# Altium PCB turnsig2.PcbDoc
Units mil, origin at the board's own origin, x right, y up, seen from the top; angles counter-clockwise.
Board outline 990 x 400 mil, 2 copper layers (Top Layer, Bottom Layer); 17 components, 13 nets, 48 pads, 6 vias.
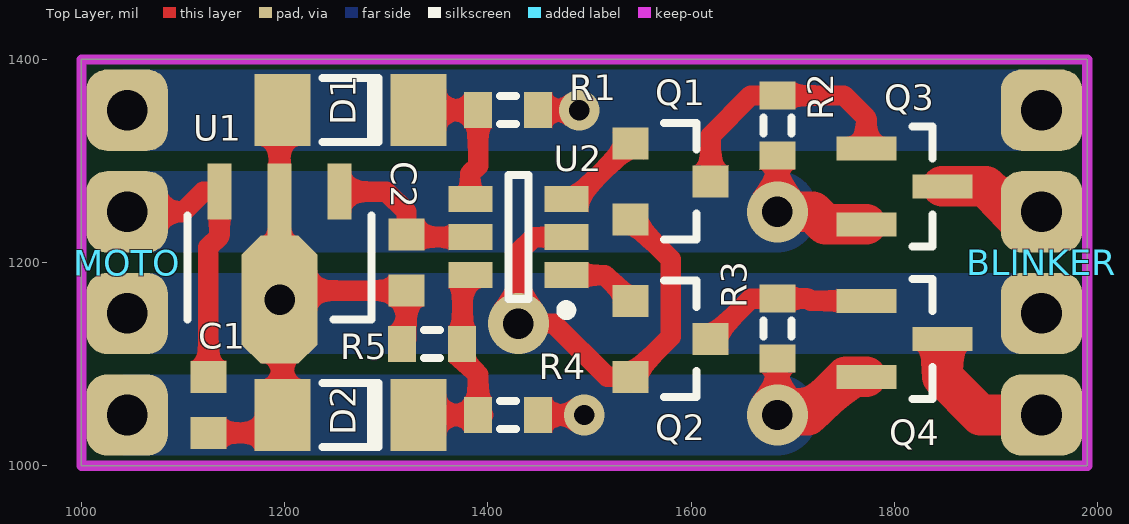
[diagram p0: Top Layer view]
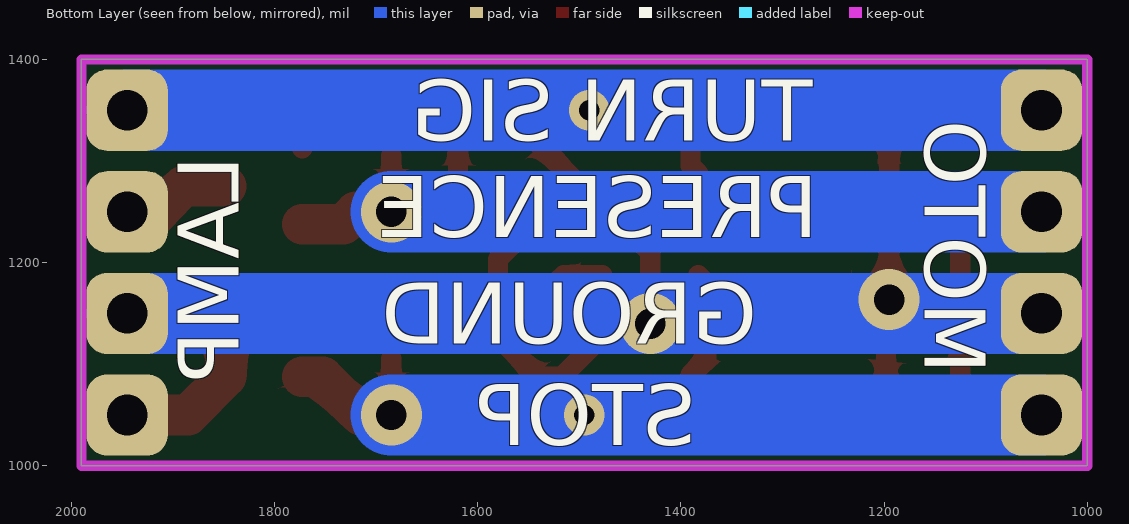
[diagram p1: Bottom Layer view, seen from below]

## Layer stack, top to bottom
Top Solder: solder mask 0.4, Solder Resist, Dk 3.5
Top Layer: signal copper 1.4
Dielectric 1: dielectric 12.6, FR-4, Dk 4.8
Bottom Layer: signal copper 1.4
Bottom Solder: solder mask 0.4, Solder Resist, Dk 3.5

## Board outline
1000,1000 1000,1400 1990,1400 1990,1000

## Design rules (kind name [scope] priority, off if disabled: settings)
Clearance [All] p1: gap=5 ignorepadtopadclearanceinfootprint=TRUE except(0: Arc-Text Track-Text SMDPad-Text THPad-Text Via-Text Fill-Text Poly-Text Region-Text Text-Text Text-Hole)
HoleSize [All] p1: absolutevalues=TRUE maxlimit=250 minlimit=1 maxpercent=80.000 minpercent=20.000
PolygonConnect [All] p1: connectstyle=Relief reliefconductorwidth=10 reliefentries=4 polygonreliefangle="90 Angle" airgapwidth=10
RoomDefinition turnsig2 [InComponentClass('turnsig2')] p1: confinementstyle=ConfineIn formatcopy=TRUE lockcomponents=FALSE outline 860,970 2395,970 2395,1465 860,1465
RoutingVias [All] p1: holewidth=28 width=50 viastyle="Through Hole" minholewidth=28 minwidth=50 maxholewidth=28 maxwidth=50
SilkToSilkClearance [All] p1: silktosilkclearance=0
SilkToSolderMaskClearance [IsPad] p1: minsilkscreentomaskgap=0 clearancetoexposedcopper=TRUE
SolderMaskExpansion [All] p1: expansion=0
Width [All] p1: maxlimit=100 minlimit=10 preferedwidth=20
27 further rules are at their usual default settings.

## Components (designator, comment, footprint, x,y, rotation, side; value= is the part's Value field where it differs from the comment)
BLINKER "Header 4" wireheader 1945,1200 r0 top
C1 "Cap Semi" 1608[0603] 1125,1060 r270 top value=1uF
C2 "Cap Semi" 1608[0603] 1320,1200 r270 top value=1uF
D1 "TZMC4V7-GS08" SOD-80/MLL34 1265,1350 r0 top
D2 "TZMC4V7-GS08" SOD-80/MLL34 1265,1050 r0 top
MOTO "Header 4" wireheader 1045,1200 r0 top
Q1 "2N7002KT1G" ONSC-SOT-23-3-318-08_V 1580,1280 r0 top
Q2 "2N7002KT1G" ONSC-SOT-23-3-318-08_V 1580,1125 r0 top
Q3 "IRLML9303TRPBF" SOT23-3N 1810,1275 r0 top
Q4 "IRLML9303TRPBF" SOT23-3N 1810,1125 r0 top
R1 "Res3" J1-0603 1420,1350 r0 top value=5k1
R2 "Res3" J1-0603 1685,1335 r270 top value=5k1
R3 "Res3" J1-0603 1685,1135 r270 top value=5k1
R4 "Res3" J1-0603 1420,1050 r0 top value=5k1
R5 "Res3" J1-0603 1345,1120 r0 top value=5k1
U1 "L78L05ABUTR" SOT-89_N 1195,1195 r270 top
U2 "ATtiny10-TSHR" 6ST1_N 1430,1225 r180 top

## Footprints (in the part's own frame and the unit in brackets; to place one, negate y for a bottom-side part, rotate by r counter-clockwise, add the part's x,y. Pads: shape width x height; smd on the part's side, far side on the other; paste and mask are expansions set on the pad)
6ST1_N [mm] "SOT23, 6-Leads, Body 2.9x1.6mm, Pitch 0.95mm, Lead Span 2.7mm, IPC Medium Density"
  rect 1.1x0.65 smd: 1(-1.2,0.95) 2(-1.2,0) 3(-1.2,-0.95) 4(1.2,-0.95) 5(1.2,0) 6(1.2,0.95)
  silkscreen extent -1.33,-1.55 0.25,1.95, body extent -0.9,-1.55 0.9,1.55, height 1.45
1608[0603] [mm] "Chip Capacitor, Body 1.6x0.8mm, IPC High Density"
  rect 0.8x0.9 smd: 1(-0.7,0) 2(0.7,0)
  body extent -0.87,-0.48 0.87,0.48, height 1.3
J1-0603 [mm] "Chip Resistor, Body 1.6x0.8mm, IPC High Density"
  rect 0.7x0.9 smd: 1(-0.75,0) 2(0.75,0)
  silkscreen extent -0.2,-0.35 0.2,0.35, body extent -0.85,-0.48 0.85,0.48, height 0.9
ONSC-SOT-23-3-318-08_V [mm] "SOT23, 3-Leads, Body 2.92x1.3mm, Pitch 0.95mm"
  rect 0.9x0.8 smd: 1(-1,0.95) 2(-1,-0.95) 3(1,0)
  silkscreen extent -0.16,-1.46 0.65,1.46, body extent -0.65,-1.46 0.65,1.46, height 1.11
SOD-80/MLL34 [mm] "Metal Electrode Face (MELF) Diode; Body 3.5 x 1.7 mm (LxDia)"
  rect 1.4x1.8 smd: 1(-1.7,0) 2(1.7,0)
  silkscreen extent -0.7,-0.8 0.7,0.8, body extent -1.96,-0.79 1.96,0.79, height 1.57
SOT23-3N [mm] "SOT23, 3-Leads, Body 2.9x1.3mm, Pitch 0.95mm, Lead Span 2.5mm, IPC Medium Density"
  rect 1.5x0.6 smd: 1(-0.95,0.95) 2(-0.95,-0.95) 3(0.95,0)
  silkscreen extent 0.2,-1.5 0.7,1.5, body extent -0.7,-1.5 0.7,1.5, height 1.1
SOT-89_N [mm] "SOT89, 3-Leads, Body 4.5x2.4 mm, Pitch 1.5mm, Lead Span 4.1mm, IPC Medium Density"
  rect 1.4x0.6 smd: 1(-1.9,1.5) 3(-1.9,-1.5)
  rect 1.8x0.6 smd: 2(-1.7,0)
  oct 3.2x1.9 smd: 2(0.8,0)
  silkscreen extent -1.3,-2.3 1.3,2.3, body extent -1.3,-2.3 1.3,2.3, height 1.6
wireheader [mil] "wireheader"
  rrect50% 80x80 hole 40: 1(0,150) 2(0,50) 3(0,-50) 4(0,-150)

## Part data
BLINKER MOTO: "Header, 4-Pin", LatestRevisionDate=17-Jul-2002, LatestRevisionNote="Re-released for DXP Platform.", Publisher="Altium Limited"
C1 C2: "Capacitor (Semiconductor SIM Model)", Supplier Part Number 1=CL10A105KA8NNNC, LatestRevisionDate=29-May-2009, LatestRevisionNote="IPC-7351 Footprint Added.", PackageDescription="Chip Capacitor", PackageReference=C1206, Published=8-Jun-2000, Publisher="Altium Limited", Supplier 1=TME
D1 D2: library part "D Zener", Voltage=4V7, LatestRevisionDate=17-Jul-2002, LatestRevisionNote="Re-released for DXP Platform.", PackageDescription="Diode, Thru-Hole; 2 Leads; 0.7 in Pin Spacing", PackageReference=DIODE-0.7, Published=8-Jun-2000, Publisher="Altium Limited", Supplier 1=TME, Supplier Part Number 1=TZMC4V7-GS08
Q1 Q2: "Small Signal MOSFET, 60 V, 380 mA, Single, N-Channel, 3-Pin SOT-23, Pb-Free, Tape and Reel", Manufacturer="On Semiconductor", Package Type=SOT-23-3, Supplier Part Number 1=2N7002KT1GOSCT-ND, Channel Polarity="N Channel", Ciss Typ (pF)=24.5, ComponentLink1Description="Manufacturer URL", ComponentLink1URL=http://www.onsemi.com/, ComponentLink2Description=Datasheet, ComponentLink2URL=http://www.onsemi.com/pub_link/Collateral/2N7002K-D.PDF, ComponentLink3Description="Package Specification", ComponentLink3URL=http://www.onsemi.cn/pub_link/Collateral/318-08.PDF, Configuration=Single, Coss Typ (pF)=4.2, Crss Typ (pF)=2.2, DatasheetVersion="Rev. 11", ID Max (A)=0.38, Mounting Technology="Surface Mount", PackageDescription="3-Pin Small Outline Transistor, Body 2.92 x 1.3 mm, Pitch 0.95 mm", PackageReference=SOT-23-3-318-08, PackageVersion="Rev. AP, 11/2009", Packing="Tape and Reel", PartNumber=2N7002KT1G, RoHS=Pb-Free, Supplier 1=Digi-Key, Supplier 2=Digi-Key, Supplier 3=Farnell, Supplier 4=Farnell, Supplier 5=Newark, Supplier 6=Newark, Supplier 7=Mouser, Supplier 8=TME, Supplier Part Number 2=2N7002KT1GOSDKR-ND, Supplier Part Number 3=2317619, Supplier Part Number 4=2317894, Supplier Part Number 5=50M6388, Supplier Part Number 6=09R9863, Supplier Part Number 7=863-2N7002KT1G, Supplier Part Number 8=2N7002KT1G, V(BR)DSS Min (V)=60, VGS(th) Max (V)=2.3, VGS Max (V)=20
Q3 Q4: library part SI2323DS, "MOSFET-P", Supplier 1=TME, Supplier Part Number 1=IRLML9303TRPBF
R1 R2 R3 R4 R5: "Resistor", Supplier Part Number 1=SMD0603-5K1, LatestRevisionDate=29-May-2009, LatestRevisionNote="IPC-7351 Footprint Added.", PackageDescription="Chip Resistor", PackageReference=J1-0603, Published=8-Jun-2000, Publisher="Altium Limited", Supplier 1=TME
U1: "Positive Voltage Regulator, 5V, 4-Pin SOT-89, Tape and Reel", Supplier Part Number 1=L78L05ABU, ComponentLink1Description="Manufacturer URL", ComponentLink1URL=http://www.st.com, ComponentLink2Description=Datasheet, ComponentLink2URL=http://www.st.com/internet/com/TECHNICAL_RESOURCES/TECHNICAL_LITERATURE/DATASHEET/CD00000446.pdf, DatasheetVersion=Feb-2011, PackageDescription="3-Pin SOT-89 Package 1.5 mm Pitch, 4.1 mm Lead Span", PackageReference=SOT-89, PackageVersion=2011, PartNumber=L78L05ABUTR, Supplier 1=TME
U2: "8-bit AVR Microcontroller, 1.8-5.5V, 1KB Flash, 32 Bytes SRAM, ADC, 6-pin SOT-23, Industrial (-40°C to 85°C), Pb-Free, Reel", Supplier Part Number 1=ATTINY10-TSHRCT-ND, Code_IPC=SOT26A-6, Code_JEDEC=MO-178-AB, ComponentLink1Description="Manufacturer Link", ComponentLink1URL=http://www.atmel.com/products/avr/default.asp?, ComponentLink2Description="ATtiny4/5/9/10 Datasheet", ComponentLink2URL=http://www.atmel.com/dyn/resources/prod_documents/doc8127.pdf, ComponentLink3Description="ATtiny4/5/9/10 Summary", ComponentLink3URL=http://www.atmel.com/dyn/resources/prod_documents/8127S.pdf, ComponentLink4Description="Atmel.com Home", ComponentLink4URL=http://www.atmel.com, DatasheetVersion="revD, Feb-2010", PackageDescription="6-Lead, 2.90 x 1.60 mm Plastic Small Outline Package (SOT23)", PackageReference=6ST1, PackageVersion="revA, Jun-2008", Published=1-Apr-2010, Publisher="Altium Limited", Supplier 1=Digi-Key, Supplier 2=Digi-Key, Supplier 3=Farnell, Supplier 4=Mouser, Supplier 5=TME, Supplier Part Number 2=ATTINY10-TSHRDKR-ND, Supplier Part Number 3=1748538, Supplier Part Number 4=556-ATTINY10-TSHR, Supplier Part Number 5=ATTINY10-TSHR

## Via types
v1: diameter 60, hole 30, Top Layer to Bottom Layer, tented bottom, 3 vias
v2: diameter 40, hole 20, Top Layer to Bottom Layer, tented both sides, 2 vias
v3: diameter 60, hole 30, Top Layer to Bottom Layer, 1 vias

## Nets (pads, with @x,y where several pads share a name; then routed paths per layer and width w, separated by ;. In a path a pad name is that pad's centre, name@x,y a point inside that pad or via, vN(x,y) a via of type N, cw(c..) or ccw(c..) an arc to the next point about the centre after c; other vN are vias at no path point)
BLINK_12V: BLINKER.1 MOTO.1 R1.2 | length 940.5
  Top Layer w20: R1.2 v2(1490,1350)
  Bottom Layer w80: MOTO.1 v2(1490,1350) BLINKER.1
BLINK_DET: D1.2 R1.1 U2.4 | length 159.3
  Top Layer w20: D1.2@1321.93,1350 D1.2 R1.1 1390.47,1295.47 1382.76,1287.76 U2.4
GND: BLINKER.3 C1.2 C2.2 D1.1 D2.1 MOTO.3 Q1.2 Q2.2 R5.1 U1.2 U2.2 | length 1910.2
  Top Layer w10: D1.1@1191.93,1350 D1.1@1195,1346.93
  Top Layer w20: C1.2 1180.51,1032.44 D2.1 1198.07,1172.44 C2.2 1320,1124.53 R5.1 ; v3(1195,1163.5) 1195,1261.93 D1.1@1195,1346.93 ; U2.2 1445,1225 1430,1210 v1(1430,1140) 1465,1140 1517.4,1087.6 Q2.2 1580,1126.97 1580,1203.23 Q1.2
  Bottom Layer w80: MOTO.3 1430,1150 BLINKER.3
IN_POS_12V: C1.1 MOTO.2 Q3.2 R2.2 U1.3 | length 1074.1
  Top Layer w20: MOTO.2 1100,1250 1119.8,1269.8 U1.3 1135.94,1225.94 1125,1215 C1.1 ; v1(1685,1250) R2.2
  Top Layer w40: v1(1685,1250) 1720,1250 1732.4,1237.6 Q3.2
  Bottom Layer w80: MOTO.2 v1(1685,1250)
IN_STOP_12V: MOTO.4 Q4.2 R3.2 R4.2 | length 839.1
  Top Layer w20: R4.2@1454.53,1050 v2(1495,1050) ; v1(1685,1050) R3.2
  Top Layer w40: v1(1685,1050) 1715,1050 1752.6,1087.6 Q4.2
  Bottom Layer w80: MOTO.4 v2(1495,1050) v1(1685,1050)
NetQ1_3: Q1.3 Q3.1 R2.1 | length 253.8
  Top Layer w20: Q1.3 1619.37,1325 1658.9,1364.53 R2.1 1750.47,1364.53 1772.6,1342.4 Q3.1
NetQ2_3: Q2.3 Q4.1 R3.1 | length 170.5
  Top Layer w20: Q2.3 1658.9,1164.53 R3.1 1715.47,1164.53 1717.6,1162.4 Q4.1
OUT_POS_12V: BLINKER.2 Q3.3 | length 108
  Top Layer w40: Q3.3 1890,1275 1915,1250 BLINKER.2
OUT_STOP_12V: BLINKER.4 Q4.3 | length 140.6
  Top Layer w40: Q4.3@1847.4,1115 1847.4,1087.6 1885,1050 BLINKER.4
PWM_POS: Q1.1 U2.3 | length 86.2
  Top Layer w20: U2.3 1485.63,1262.4 Q1.1
PWM_STOP: Q2.1 U2.1 | length 73.8
  Top Layer w20: U2.1 1515.43,1187.6 Q2.1
STOP_DET: D2.2 R4.1 R5.2 U2.6 | length 215.8
  Top Layer w20: D2.2@1326.93,1050 D2.2 R4.1@1395.47,1050 ; U2.6 1375,1179.84 1375,1105 1390.47,1089.53 R4.1
VCC: C2.1 U1.1 U2.5 | length 159
  Top Layer w20: U1.1 1300.2,1269.8 1320,1250 1320,1230 1325,1225 U2.5

## Keep-outs
Keep-Out Layer:
  the board outline again, w10

## Silkscreen, mask and mechanical layers (free items; w line width, h text height)
Bottom Overlay:
  text "TURN SIG" at 1270,1320 h60
  text "LAMP" at 1835,1305 h60 r270
  text "PRESENCE" at 1265,1225 h60
  text "GROUND" at 1325,1120 h60
  text "MOTO" at 1160,1090 h60 r90
  text "STOP" at 1385,1020 h60
Top Paste:
  circle w30: c1685,1250 r15
  circle w30: c1685,1050 r15